# Altium PCB MOSFET.PcbDoc
Units mm, origin at the board's own origin, x right, y up, seen from the top; angles counter-clockwise.
Board outline 55 x 41.66 mm, 2 copper layers (Top Layer, Bottom Layer), stack 1.569 mm thick; 14 components, 7 nets, 58 pads, 5 vias.
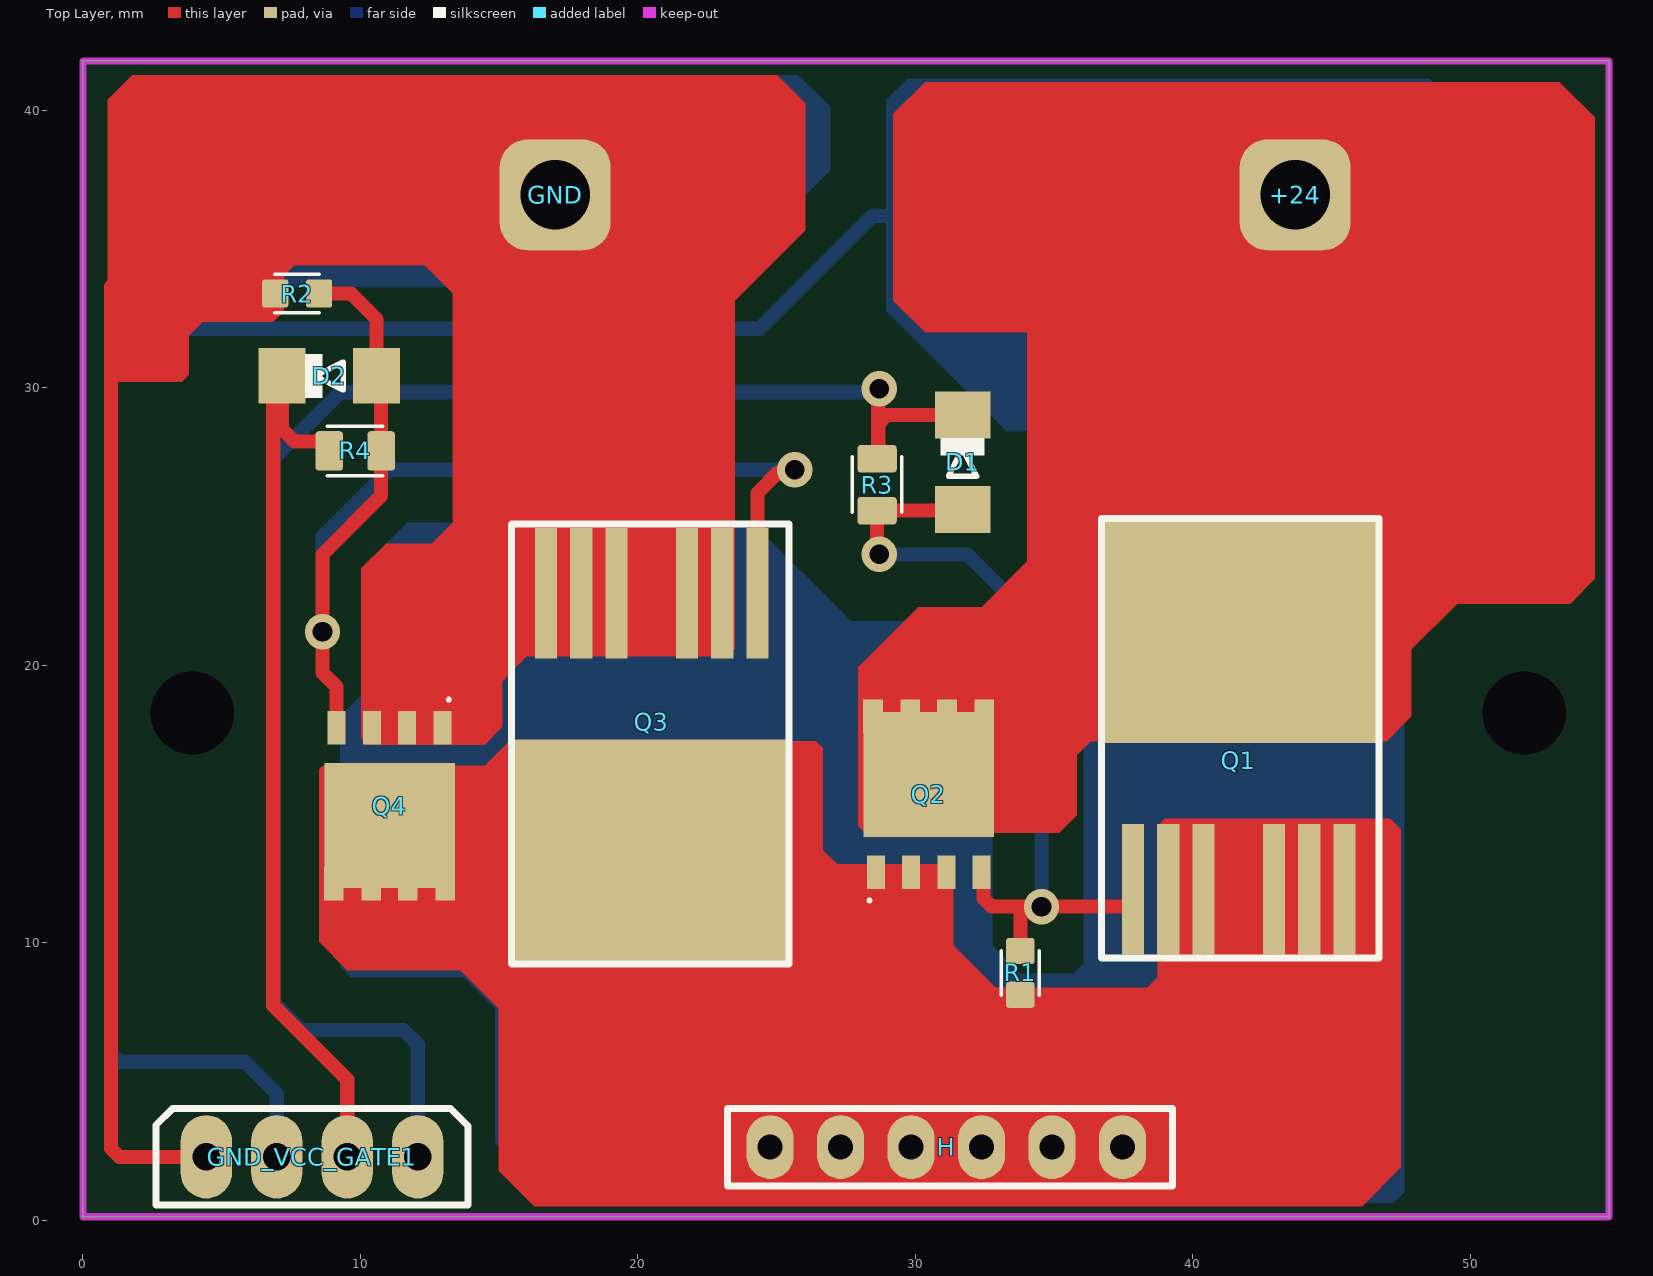
[diagram p0: Top Layer view]
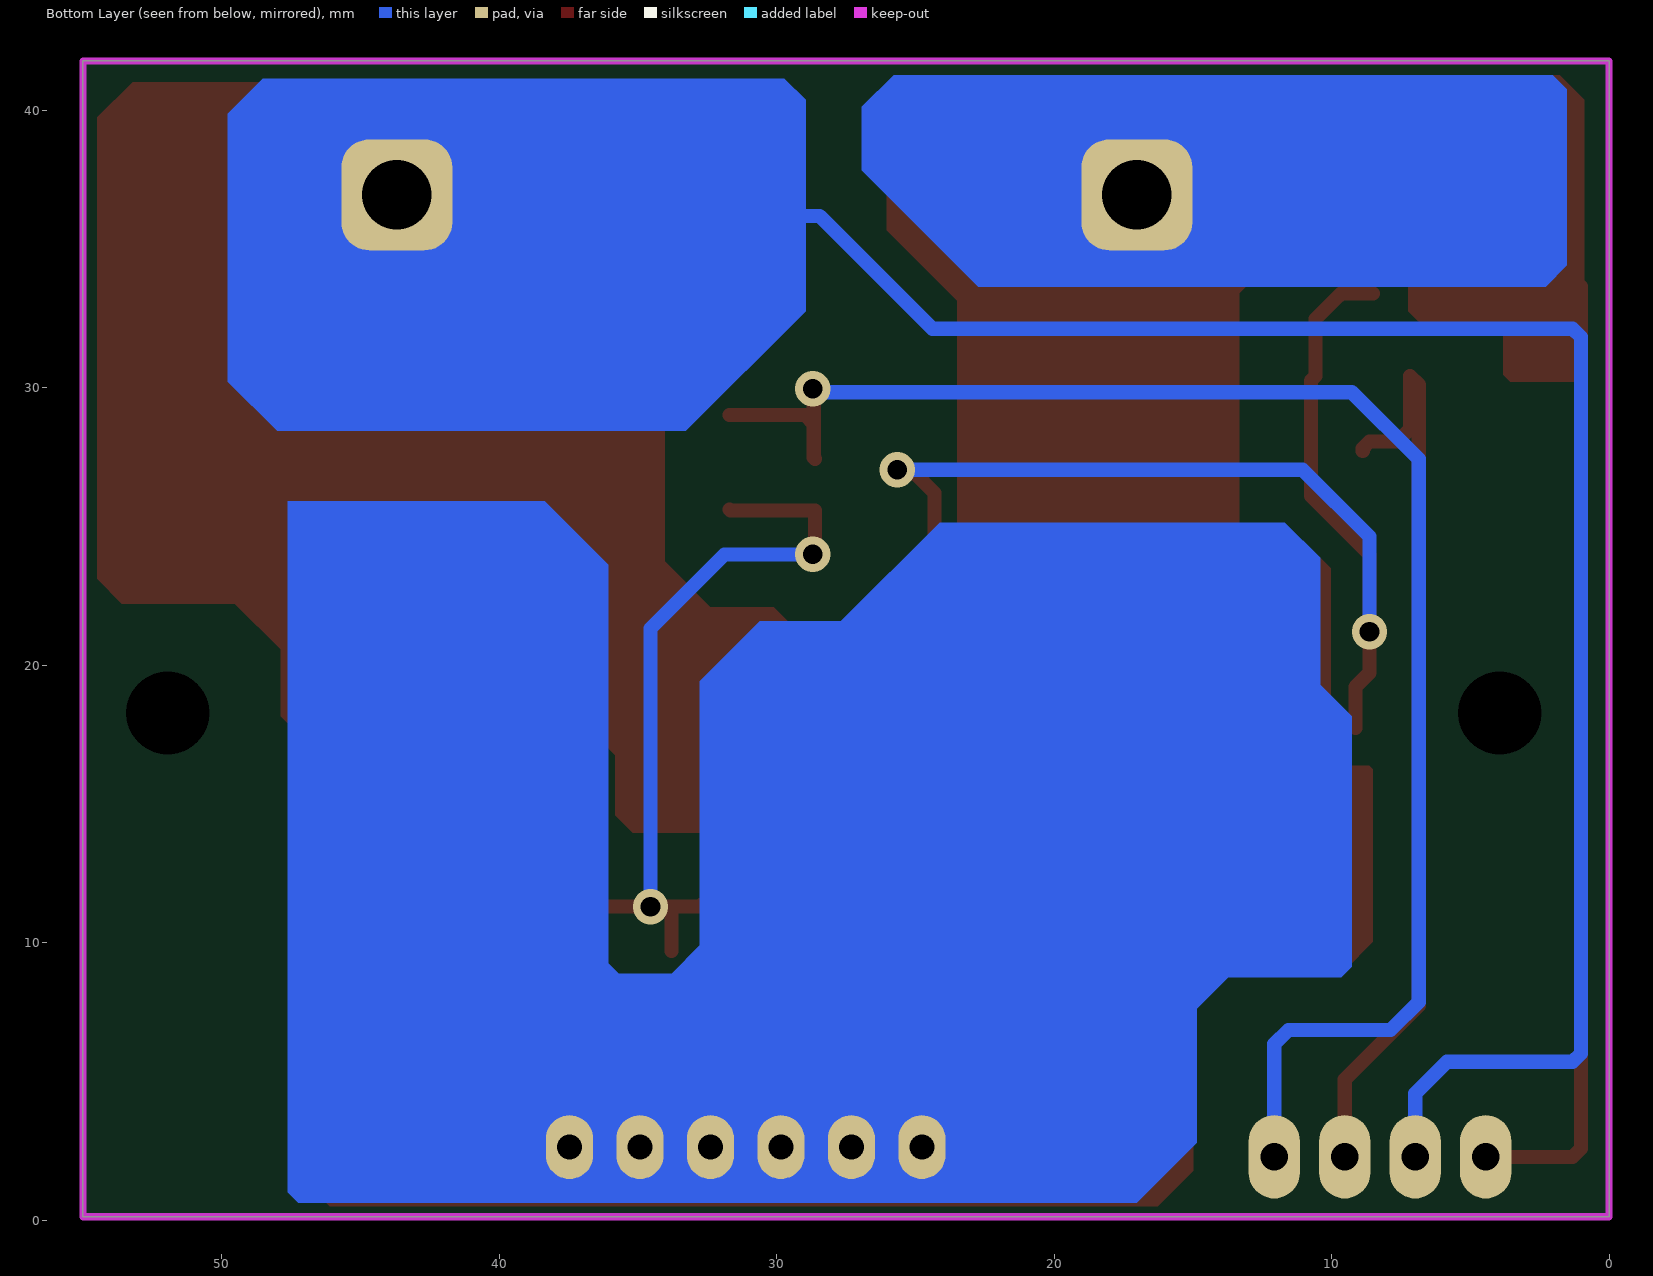
[diagram p1: Bottom Layer view, seen from below]
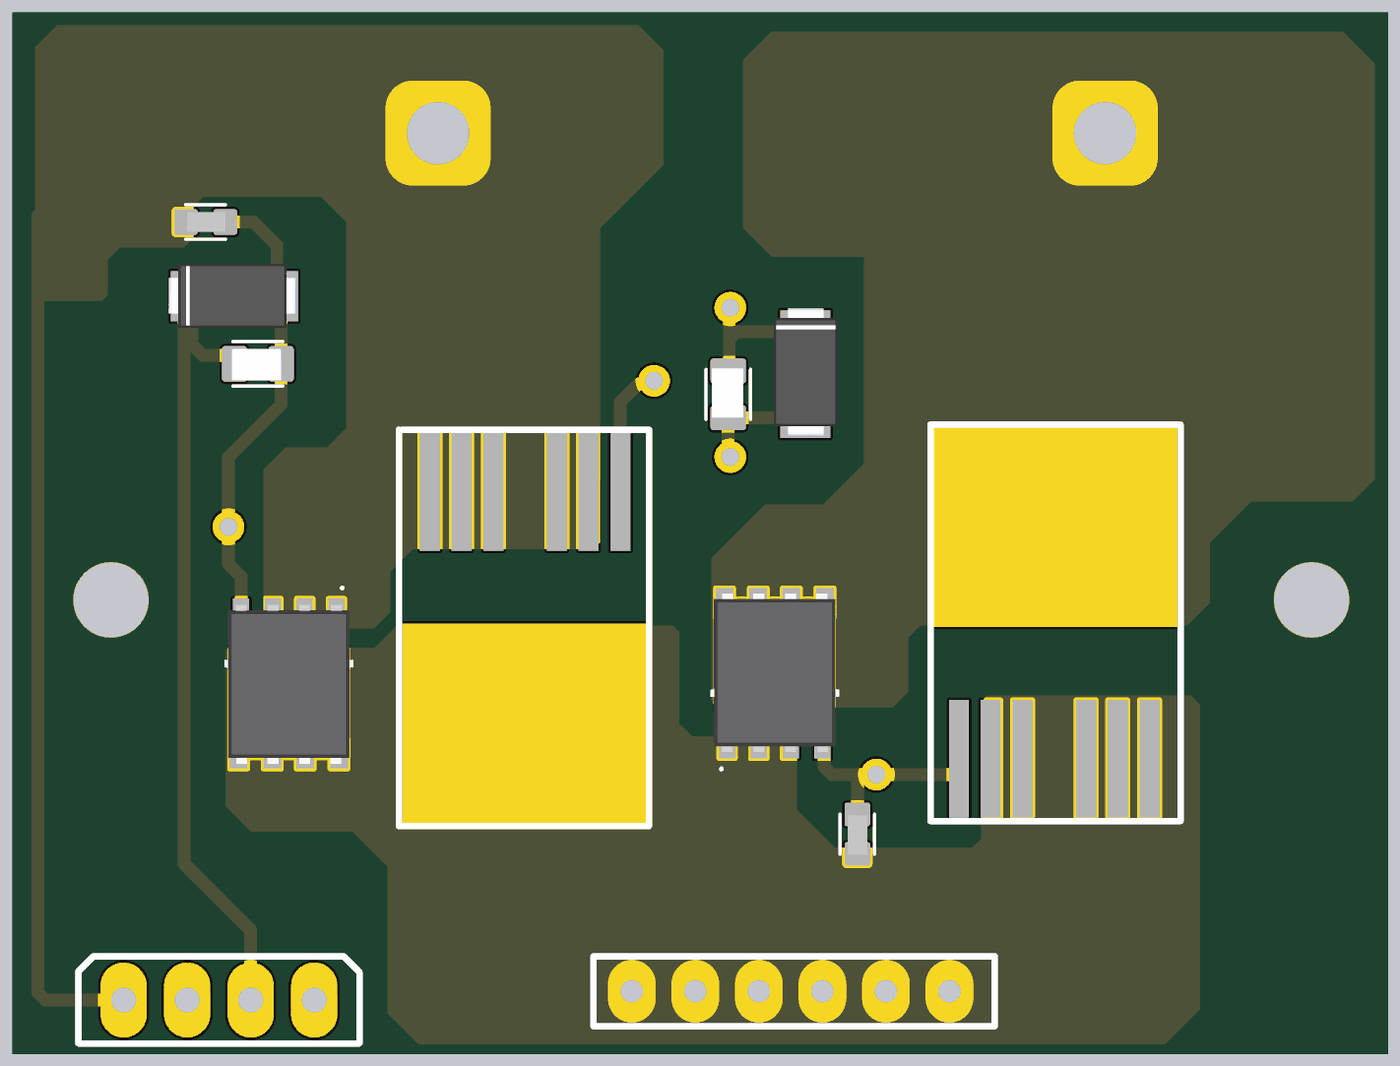
[diagram p2: 3D render of the assembled board from above, using the file's embedded part models]

## Layer stack, top to bottom
Top Solder: solder mask 0.0254, SM-001, Dk 4
Top Layer: signal copper 0.035
Dielectric 1: core 1.4986, Core-043, Dk 4.3
Bottom Layer: signal copper 0.035
Bottom Solder: solder mask 0.0254, SM-001, Dk 4

## Board outline
0,0.127 55,0.127 55,41.783 0,41.783

## Design rules (kind name [scope] priority, off if disabled: settings)
Clearance [All] p1: gap=0.254 ignorepadtopadclearanceinfootprint=FALSE except(0: Arc-Hole Track-Hole SMDPad-Hole THPad-Hole Via-Hole Fill-Hole Poly-Hole Region-Hole Text-Hole)
PolygonConnect [All] p1: connectstyle=Relief reliefconductorwidth=0.254 reliefentries=4 polygonreliefangle="90 Angle" airgapwidth=0.254
RoutingVias [All] p1: holewidth=0.711 width=1.27 viastyle="Through Hole" minholewidth=0.711 minwidth=1.27 maxholewidth=0.711 maxwidth=1.27
SolderMaskExpansion [All] p1: expansion=0.102 istentingtop=FALSE
Width [All] p1: maxlimit=1.27 minlimit=0.254 preferedwidth=0.254 minimp=50.000000 maximp=50.000000 favimp=50.000000
30 further rules are at their usual default settings.

## Components (designator, comment, footprint, x,y, rotation, side; value= is the part's Value field where it differs from the comment)
+24 "PIN1" PIN1 43.688,36.957 r0 top
D1 "" mini_melf 31.75,27.178 r270 top
D2 "" mini_melf 9.017,30.48 r0 top
GND "PIN1" PIN1 17.018,36.957 r0 top
GND_VCC_GATE1 "CONECTOR/XH/4PIN" CONECTOR/XH/4PIN 4.445,2.286 r0 top
H "PIN_HEADER6" pin_header_6pin 37.465,2.638 r180 top
Q1 "HY4504B6" TO-263-6L 45.466,11.938 r90 top
Q2 "MOSFET_N_CH" HYG025N06LS1C2 30.48,16.07 r90 top
Q3 "MOSFET_N_CH" TO-263-6L 16.688,22.606 r270 top
Q4 "HY4504B6" HYG025N06LS1C2 11.049,14.224 r270 top
R1 "10k" RES/0603 33.782,9.017 r90 top
R2 "10k" RES/0603 7.62,33.401 r180 top
R3 "4.7R" RES/0805 27.686,27.559 r270 top
R4 "4.7R" RES/0805 8.763,26.797 r0 top

## Footprints (in the part's own frame and the unit in brackets; to place one, negate y for a bottom-side part, rotate by r counter-clockwise, add the part's x,y. Pads: shape width x height; smd on the part's side, far side on the other; paste and mask are expansions set on the pad)
CONECTOR/XH/4PIN [mm]
  oval 1.85x3 hole 1: 1(0,0) 2(2.54,0) 3(5.08,0) 4(7.62,0)
  silkscreen extent -1.81,-1.73 9.43,1.75
HYG025N06LS1C2 [mm]
  rect 1.2x0.65 smd: 1(-3.525,-1.905) 3(-3.525,-0.635) 3(-3.525,0.635) 3(-3.525,1.905)
  rect 4.5x4.7 smd paste-1: 2(0,0)
  rect 1.2x0.71 smd: 2(2.094,-2.007) 2(2.094,-0.66) 2(2.094,0.66) 2(2.094,2.007)
  silkscreen extent -4.64,2.03 -4.44,2.23, body extent -3.87,-2.57 2.48,2.58, height 1.1
mini_melf [mm]
  rect 1.7x2 smd: A(1.557,-0.049) K(-1.843,-0.049)
  silkscreen extent -1.01,-0.84 0.36,0.74, body extent -2.79,-1.31 2.35,1.25, height 2.5
PIN1 [mm]
  rrect50% 4x4 hole 2.5: 1(0,0)
pin_header_6pin [mm]
  oval 1.7x2.3 hole 0.9: 1(0,0) 2(2.54,0) 3(5.08,0) 4(7.62,0) 5(10.16,0) 6(12.7,0)
  silkscreen extent -1.81,-1.4 14.23,1.4
RES/0603 [mm]
  rrect20% 0.94x1.02 smd: 1(-0.889,0) 2(0.691,0)
  silkscreen extent -0.9,-0.69 0.7,0.69, body extent -0.93,-0.41 0.67,0.39, height 0.43
RES/0805 [mm]
  rrect25% 1x1.42 smd: 1(0.113,0.933) 2(1.983,0.933)
  silkscreen extent 0.05,0.04 2.05,1.82, body extent 0,0.28 2,1.53, height 0.6
TO-263-6L [mm]
  rect 4.7x0.8 smd: 1(0,7.62) 3(0,6.35) 3(0,5.08) 3(0,2.54) 3(0,1.27) 3(0,0)
  rect 8x10 smd paste-5: 2(9.271,3.759)
  silkscreen extent -2.49,-1.24 13.36,8.76

## Part data
D1 D2: library part DIOD/RECTIFIERS
Q1 Q4: library part MOSFET_N_CH
R1 R2 R3 R4: library part RES/SMD

## Free pads (board coordinates)
  round 1.524 hole 3: 2(3.937,18.288) 2(51.943,18.288)

## Via types
v1: diameter 1.27, hole 0.711, Top Layer to Bottom Layer, 5 vias

## Nets (pads, with @x,y where several pads share a name; then routed paths per layer and width w, separated by ;. In a path a pad name is that pad's centre, name@x,y a point inside that pad or via, vN(x,y) a via of type N, cw(c..) or ccw(c..) an arc to the next point about the centre after c; other vN are vias at no path point)
+24: +24.1 GND_VCC_GATE1.2 Q1.2 Q2.2 | length 73.8
  Bottom Layer w0.508: GND_VCC_GATE1.2 6.985,4.572 5.842,5.715 1.314,5.715 1.016,6.013 1.016,31.833 1.314,32.131 24.384,32.131 28.448,36.195 38.354,36.195
GND: GND.1 GND_VCC_GATE1.1 Q3.3 Q4.3 R2.2 | length 56.2
  Top Layer w0.508: 3.175,35.814 1.016,33.655 1.016,2.584 1.314,2.286 GND_VCC_GATE1.1 ; R2.2 3.556,33.401 3.556,34.29 5.461,36.195 GND.1@17.018,36.195
NetD1_A: D1.A Q1.1 Q2.1 R1.2 R3.2 | length 30.4
  Top Layer w0.508: v1(28.702,24.003) 28.619,24.086 R3.2 31.656,25.576 D1.A ; Q2.1 32.456,12.474 32.456,11.601 32.754,11.303 33.649,11.303 ; R1.2 33.782,11.17 33.649,11.303 ; Q1.1 37.846,11.449 37.7,11.303 v1(34.544,11.303) 33.649,11.303
  Bottom Layer w0.508: v1(28.702,24.003) 31.877,24.003 34.544,21.336 v1(34.544,11.303)
NetD1_K: D1.K GND_VCC_GATE1.4 R3.1 | length 58.1
  Top Layer w0.508: R3.1 28.661,27.487 28.661,28.709 ; v1(28.702,29.972) 28.661,29.931 28.661,28.709 ; D1.K 28.973,29.021 28.661,28.709
  Bottom Layer w0.508: GND_VCC_GATE1.4 12.065,6.35 11.557,6.858 7.874,6.858 6.858,7.874 6.858,27.432 9.271,29.845 28.575,29.845 v1(28.702,29.972)
NetD2_A: D2.A Q3.1 Q4.1 R2.1 R4.2 | length 45.1
  Top Layer w0.508: R2.1 9.652,33.401 9.905,33.148 10.574,32.479 D2.A 10.746,30.259 R4.2 10.746,26.113 8.636,24.003 v1(8.636,21.209) 8.636,19.733 9.144,19.225 Q4.1 ; Q3.1 24.308,26.213 25.019,26.924 25.527,26.924 v1(25.654,27.051)
  Bottom Layer w0.508: v1(8.636,21.209) 8.636,24.638 11.049,27.051 v1(25.654,27.051)
NetD2_K: D2.K GND_VCC_GATE1.3 R4.1 | length 33.4
  Top Layer w0.508: R4.1 8.876,27.821 8.63,28.067 7.62,28.067 7.174,28.513 D2.K 6.858,30.115 6.858,7.747 9.525,5.08 GND_VCC_GATE1.3
NetH_1: H.1 H.2 H.3 H.4 H.5 H.6 Q1.3 Q2.3 Q3.2 Q4.2 R1.1

## Keep-outs
Keep-Out Layer:
  the board outline again, w0.254

## Other copper
Top Layer:
  region net +24: 28.194,13.97 35.179,13.97 35.814,14.605 35.814,16.764 36.322,17.272 46.99,17.272 47.879,18.161 47.879,20.574 49.53,22.225 53.594,22.225 54.483,23.114 54.483,39.751 53.213,41.021 30.353,41.021 29.21,39.878 29.21,33.147 30.353,32.004 34.036,32.004 34.036,23.749 32.385,22.098 30.099,22.098 27.94,19.939 27.94,14.224
  region net GND: 3.81,30.48 3.81,31.877 4.318,32.385 6.858,32.385 7.239,32.766 7.239,34.036 7.62,34.417 12.319,34.417 13.97,32.766 23.114,32.766 26.035,35.687 26.035,40.259 25.019,41.275 1.778,41.275 0.889,40.386 0.889,30.226 3.556,30.226
  region net GND: 10.033,17.399 10.033,23.495 10.922,24.384 12.573,24.384 13.335,25.146 13.335,37.465 14.859,38.989 22.86,38.989 23.495,38.354 23.495,20.574 23.241,20.32 16.002,20.32 15.113,19.431 15.113,17.78 14.478,17.145 10.16,17.145
  region net NetH_1: 8.636,16.383 14.478,16.383 15.367,17.272 26.416,17.272 26.67,17.018 26.67,13.335 27.178,12.827 31.242,12.827 31.369,12.7 31.369,9.906 32.893,8.382 38.354,8.382 38.735,8.763 38.735,14.224 38.989,14.478 47.117,14.478 47.498,14.097 47.498,1.905 46.101,0.508 16.256,0.508 14.986,1.778 14.986,7.62 13.589,9.017 9.525,9.017 8.509,10.033 8.509,16.256
Bottom Layer:
  region net +24: 28.956,40.386 28.956,32.766 33.274,28.448 48.006,28.448 49.784,30.226 49.784,39.878 48.514,41.148 29.718,41.148
  region net GND: 22.733,33.655 26.924,37.846 26.924,40.132 25.781,41.275 2.032,41.275 1.524,40.767 1.524,34.417 2.286,33.655
  region net NetH_1: 9.271,9.144 9.271,18.161 10.414,19.304 10.414,23.876 11.684,25.146 24.13,25.146 27.686,21.59 30.607,21.59 32.766,19.431 32.766,9.906 33.782,8.89 35.687,8.89 36.068,9.271 36.068,23.622 38.354,25.908 47.625,25.908 47.625,1.016 47.244,0.635 17.018,0.635 14.859,2.794 14.859,7.62 13.716,8.763 9.652,8.763